# Altium PCB MES.PcbDoc
Units mil, origin at the board's own origin, x right, y up, seen from the top; angles counter-clockwise.
Board outline 6000 x 4000 mil, 2 copper layers (Top Layer, Bottom Layer); 10 components, 10 nets, 30 pads, 1 vias.
Unrouted connection lines stored in the file: 5.
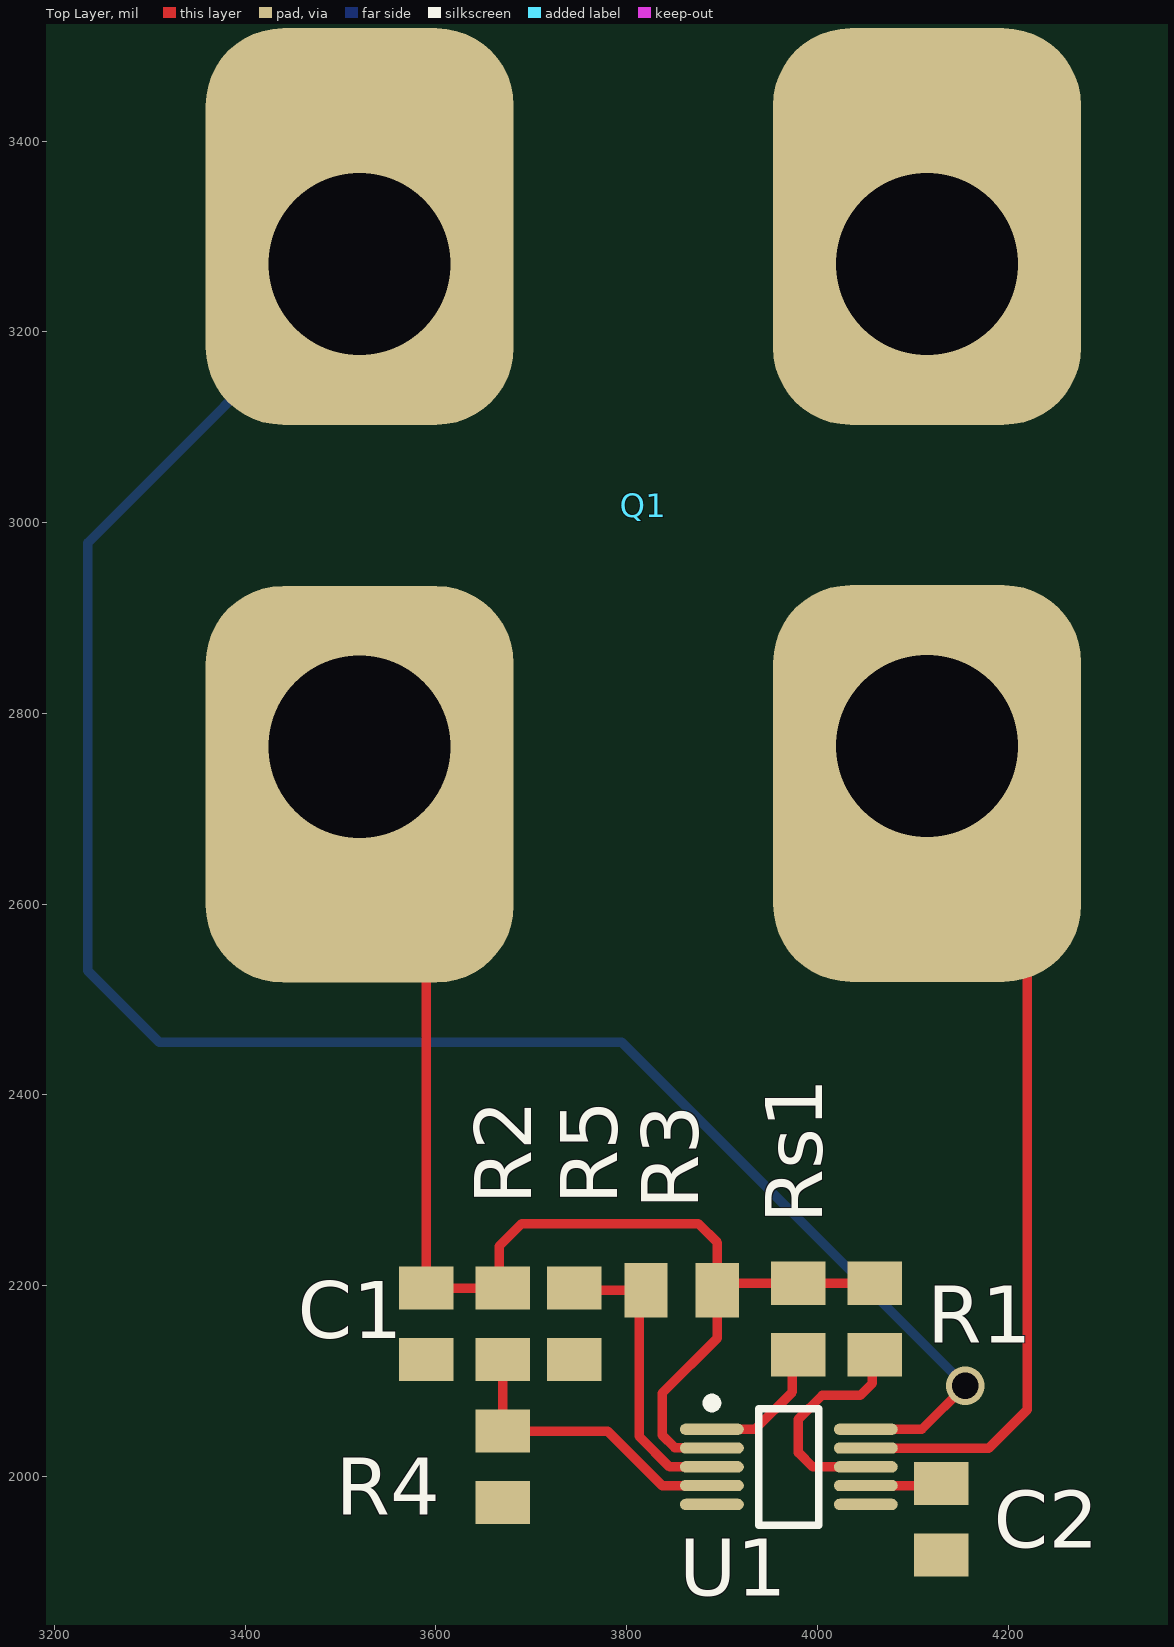
[diagram p0: Top Layer view]
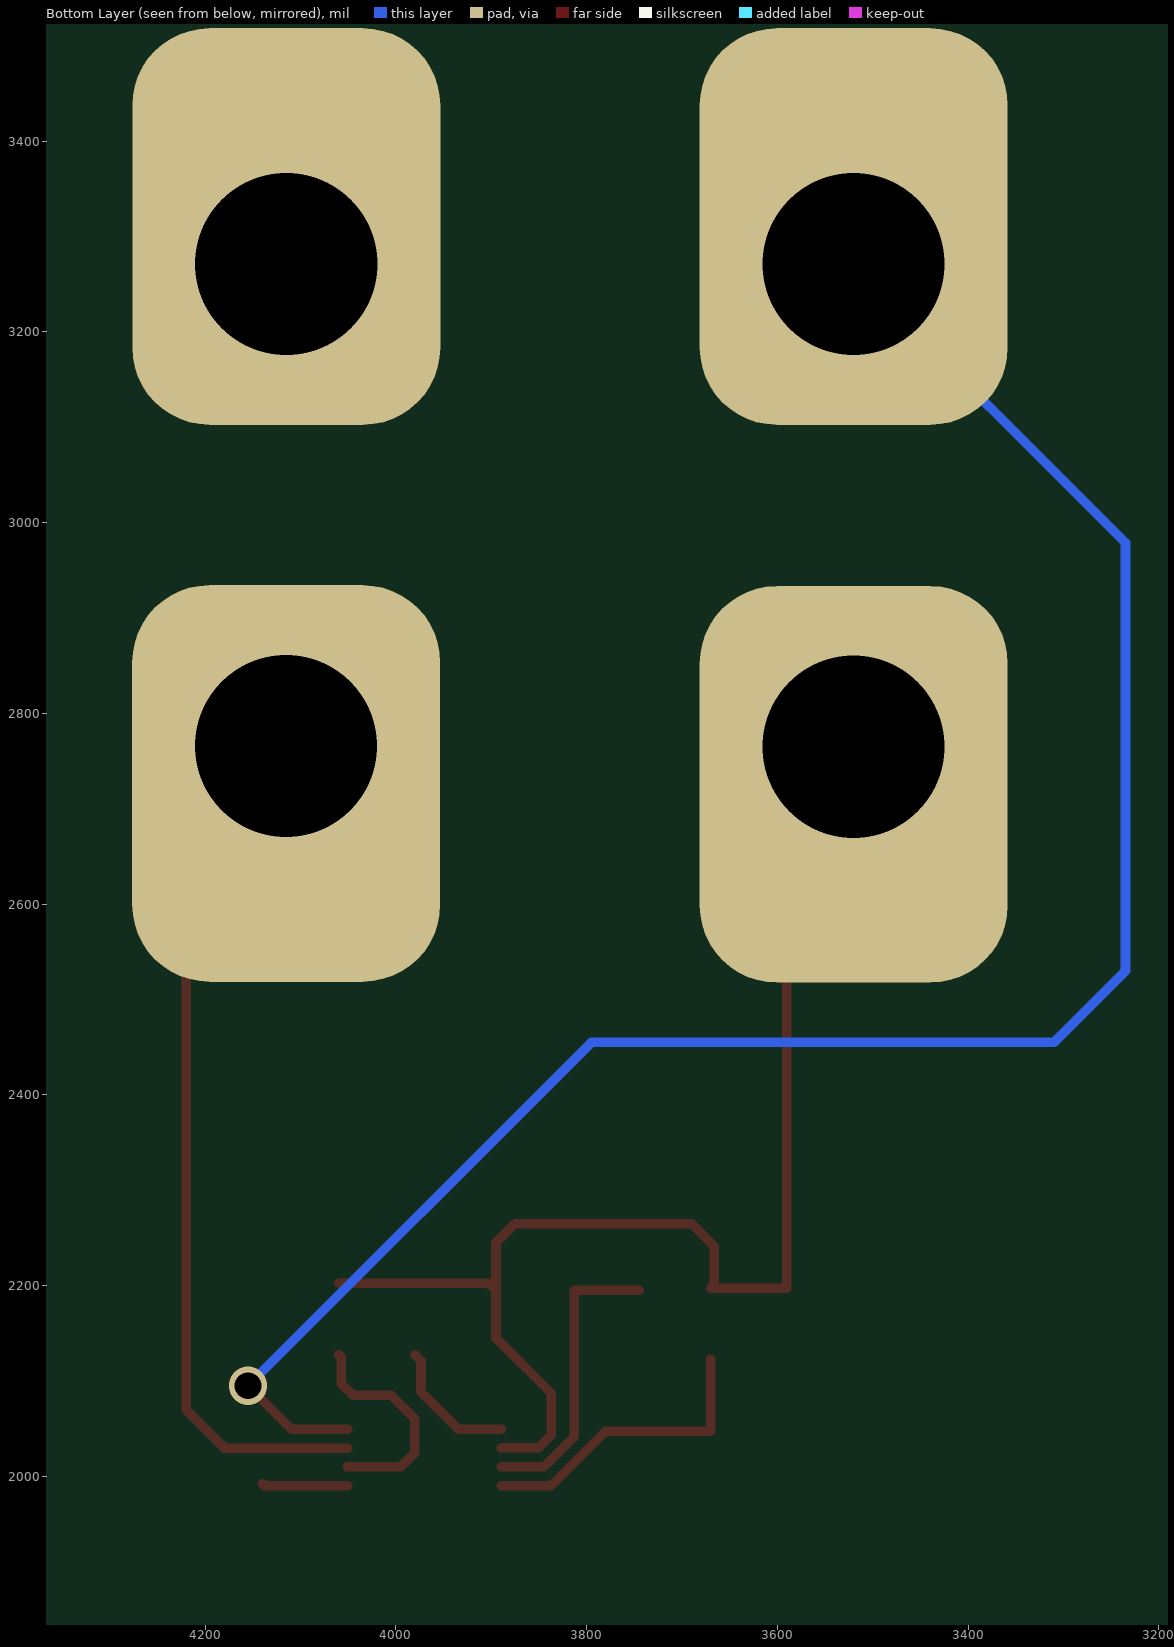
[diagram p1: Bottom Layer view, seen from below]
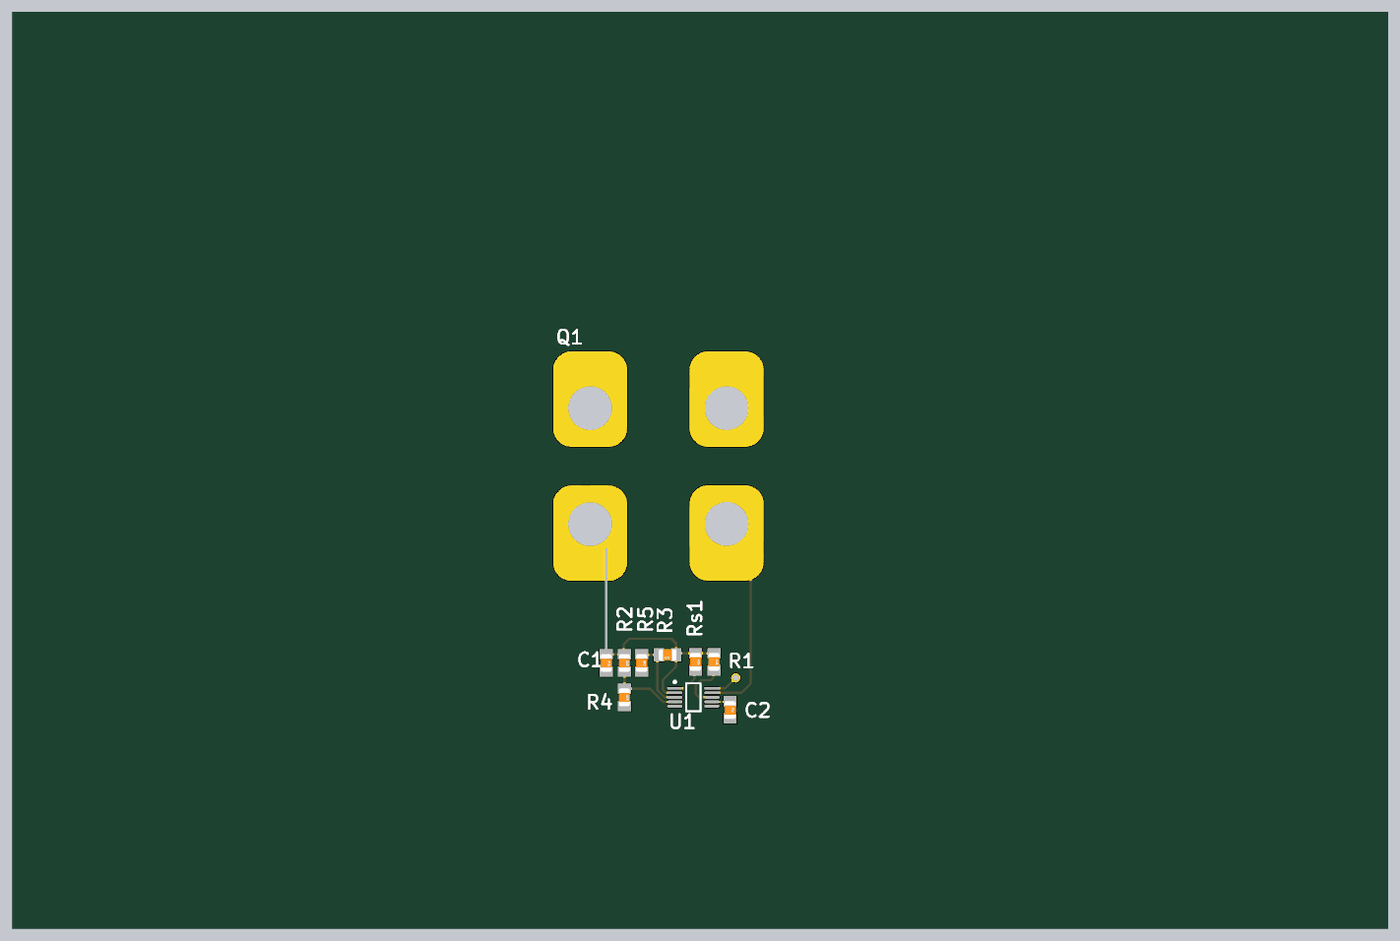
[diagram p2: 3D render of the assembled board from above, using the file's embedded part models]

## Layer stack, top to bottom
Top Solder: solder mask 0.4, Solder Resist, Dk 3.5
Top Layer: signal copper 1.4
Dielectric 1: dielectric 12.6, FR-4, Dk 4.8
Bottom Layer: signal copper 1.4
Bottom Solder: solder mask 0.4, Solder Resist, Dk 3.5

## Board outline
1000,1000 7000,1000 7000,5000 1000,5000

## Design rules (kind name [scope] priority, off if disabled: settings)
Clearance [All] p1: gap=10 ignorepadtopadclearanceinfootprint=TRUE except(0: Arc-Hole Track-Hole SMDPad-Hole THPad-Hole Via-Hole Fill-Hole Poly-Hole Region-Hole Text-Hole; 8: Arc-Arc Arc-Track Arc-SMDPad Track-Track Track-SMDPad)
PolygonConnect [All] p1: connectstyle=Relief reliefconductorwidth=10 reliefentries=4 polygonreliefangle="90 Angle" airgapwidth=10
RoutingVias [All] p1: holewidth=28 width=50 viastyle="Through Hole" minholewidth=28 minwidth=50 maxholewidth=28 maxwidth=50
SolderMaskExpansion [All] p1: expansion=4
Width [All] p1: maxlimit=30 minlimit=10 preferedwidth=10
30 further rules are at their usual default settings.

## Components (designator, comment, footprint, x,y, rotation, side; value= is the part's Value field where it differs from the comment)
C1 "Ceramic Capacitor" "Component 0805" 3590,2160 r270 top
C2 "Ceramic Capacitor" "Component 0805" 4130,1955 r270 top
Q1 "IXFN360N10T" IXFN360N10T 3520,3270.91 r0 top
R1 "Resistor" "Component 0805" 4060,2165 r270 top
R2 "Resistor" "Component 0805" 3670,2160 r270 top
R3 "Resistor" "Component 0805" 3857.6,2195 r180 top
R4 "Resistor" "Component 0805" 3670,2010 r270 top
R5 "Resistor" "Component 0805" 3745,2160 r270 top
Rs1 "Resistor" "Component 0805" 3980,2165 r270 top
U1 "LM5060Q1MM/NOPB" MUB10A_N 3970,2010 r0 top

## Footprints (in the part's own frame and the unit in brackets; to place one, negate y for a bottom-side part, rotate by r counter-clockwise, add the part's x,y. Pads: shape width x height; smd on the part's side, far side on the other; paste and mask are expansions set on the pad)
"Component 0805" [mm] "Chip Capacitor; Body 2.0 x 1.2 mm (LxW typ)"
  rect 1.15x1.45 smd: 1(-0.95,0) 2(0.95,0)
  body extent -1,-0.62 1,0.63, height 0.78
IXFN360N10T [mm] "N-Channel MOSFET 830W"
  rrect50% 8.2x10.565 hole 4.85 copper offset 0,1.002: 1(0,0) 2(15.11,0)
  rrect50% 8.2x10.565 hole 4.85 copper offset 0,-1.002: 2(15.113,-12.827) 3(0,-12.85)
MUB10A_N [mm] "TSSOP, 10-Leads, Body 3x3mm, Pitch 0.5mm, IPC Medium Density"
  oval 1.7x0.3 smd: 1(-2.05,1) 2(-2.05,0.5) 3(-2.05,0) 4(-2.05,-0.5) 5(-2.05,-1) 6(2.05,-1) 7(2.05,-0.5) 8(2.05,0) 9(2.05,0.5) 10(2.05,1)
  silkscreen extent -2.17,-1.55 0.8,1.82, body extent -1.55,-1.55 1.55,1.55, height 1.09

## Part data
C1: library part "Capacitor, Ceramic", "*", Capacitance=22uF, Voltage=25.0V
C2: library part "Capacitor, Ceramic", "*", Capacitance=2uF
Q1: "N-Channel MOSFET 830W"
R1: "Thick Film Resistors - SMD 1/16watt 1%", Resistance=6.2k
R2: "Thick Film Resistors - SMD 1/16watt 1%", Resistance=6.8k
R3: "Thick Film Resistors - SMD 1/16watt 1%", Resistance=8.2k
R4 R5: "Thick Film Resistors - SMD 1/16watt 1%", Resistance=1.0k
Rs1: "Thick Film Resistors - SMD 1/16watt 1%", Resistance=620
U1: "High-Side Protection Controller with Low Quiescent Current, 10-pin MSOP, Pb-Free", Manufacturer="National Semiconductor", PackageTopMarking=ZXTT*SZAB, PowerWise=Y, Code_JEDEC=MO-187-BA, ComponentLink1Description="Manufacturer URL", ComponentLink1URL=http://www.national.com/, ComponentLink2Description="LM5060 Datasheet", ComponentLink2URL=http://www.national.com/ds/LM/LM5060.pdf, ComponentLink3Description="LM5060 Web Page", ComponentLink3URL=http://www.national.com/pf/LM/LM5060.html, ComponentLink4Description="MUB10A Package Page", ComponentLink4URL=http://www.national.com/packaging/folders/mub10a.html, CompType=Switcher, DatasheetVersion=Dec-2010, High-Reliability=Y, PackageDescription="Mini-SO, Molded, .118 x .118 x .034in Body, 10 Lead, .0197in Pitch", PackageReference=MUB10A, PackageVersion="revB, Jul-2003", PartNumber=LM5060Q1MM/NOPB, PinCount=10, RevisionNote="PowerWise parameter updated.", RoHS=Y

## Via types
v1: diameter 40, hole 28, Top Layer to Bottom Layer, 1 vias

## Nets (pads, with @x,y where several pads share a name; then routed paths per layer and width w, separated by ;. In a path a pad name is that pad's centre, name@x,y a point inside that pad or via, vN(x,y) a via of type N, cw(c..) or ccw(c..) an arc to the next point about the centre after c; other vN are vias at no path point)
EN: U1.5
GATE: Q1.1 U1.10 | length 2082.3
  Top Layer w10: U1.10 4109.37,2049.37 v1(4155,2095)
  Bottom Layer w10: Q1.1 3520,3263.82 3235,2978.82 3235,2530 3310,2455 3795,2455 v1(4155,2095)
GND: C1.2 C2.2 R4.2 R5.2 U1.6
nPGD: R1.2 U1.8 | length 236.1
  Top Layer w10: U1.8 3995,2010 3980,2025 3980,2060 4005,2085 4045,2085 4057.4,2097.4 4057.4,2125 R1.2
OUT: Q1.2 U1.9 | length 925.4
  Top Layer w10: U1.9 4179.69,2029.69 4220,2070 4220,2660.91 Q1.2@4115,2765.91
OVP: R3.2 R5.1 U1.3 | length 310.5
  Top Layer w10: R5.1@3745,2195 3812.91,2195 3812.91,2042.09 3845,2010 U1.3
SENSE: Rs1.2 U1.1 | length 142.2
  Top Layer w10: U1.1 3934.37,2049.37 3973.64,2088.64 3973.64,2121.24 Rs1.2
TIMER: C2.1 U1.7 | length 90.2
  Top Layer w10: U1.7 4137.91,1990.32 C2.1@4140,1992.4
UVLO: R2.2 R4.1 U1.4 | length 318.1
  Top Layer w10: R2.2 R4.1 3780,2047.4 3837.09,1990.32 U1.4
VIN: C1.1 Q1.3 R1.1 R2.1 R3.1 Rs1.1 U1.2 | length 1420.4
  Top Layer w10: Q1.3 3590,2695 3590,2655 C1.1 R2.1 3666.3,2201.1 3666.3,2241.3 3690,2265 3875,2265 3895,2245 R3.1 ; U1.2 3888.95,2030.03 3850.42,2030.03 3837.09,2043.37 3837.09,2087.09 3895,2145 R3.1 ; R1.1 Rs1.1 3902.4,2202.4 R3.1